# EAGLE board Projeto (EAGLE 9.7.0)

Size 222.85 x 56.04 mm. Coordinates in mm from the lower left corner, seen from the top.
Outline: 0,0 222.85,0 222.85,56.04 0,56.04 0,0
Copper layers (1*16): Top 0.035mm / dielectric 1.5mm / Bottom 0.035mm
Design rules "default": minimum track width 6mil, minimum drill 0.35mm, track to track 6mil, track to pad 6mil, pad to pad 6mil, via to via 6mil, smd to smd 6mil, copper to edge 40mil, drill to drill 6mil, minimum pad ring 10mil, minimum via ring 8mil, stop-mask expansion 4mil, vias tented up to drill 0mil, thermal gap 10mil

## Footprints (pad centres in the part's own frame; a part is rotated, then mirrored left to right if it is on the bottom)
BATTERY-GENERIC = drill 1.118 pad 3.15 octagon: + 2.54,0; - -2.54,0
CAPPRD254W65D500H1150B = drill 0.85 pad 1.45: 1 -1.27,0; 2 1.27,0
CAP-THRU-2.54MM = drill 1.016 pad 1.88: 1 -1.27,0; 2 1.27,0
LEDRD254W60D565H860B = drill 0.981 pad 1.581: 1 -1.27,0; 2 1.27,0
RESAD1016W63L850D250B = drill 0.83 pad 1.43: 1 -5.08,0; 2 5.08,0
HA-06-SM065 = drill 1 pad 1.676: 1 -2.54,-2.54; 2 0,2.54; 3 2.54,-2.54
SWITCH-MOMENTARY-PTH-6.5MM = drill 1.016 pad 1.88: 1 -3.251,2.261; 2 3.251,2.261; 3 -3.251,-2.261; 4 3.251,-2.261
SWITCH-SPDT-PTH-8.5X3.7MM = drill 1.016 pad 1.88: 1 -2.54,0; 2 0,0; 3 2.54,0
DIP826W53P254L1930H508Q14B = drill 0.786 pad 1.386: 1 -4.13,7.62; 2 -4.13,5.08; 3 -4.13,2.54; 4 -4.13,0; 5 -4.13,-2.54; 6 -4.13,-5.08; 7 -4.13,-7.62; 8 4.13,-7.62; 9 4.13,-5.08; 10 4.13,-2.54; 11 4.13,0; 12 4.13,2.54; 13 4.13,5.08; 14 4.13,7.62
DIP762W53P254L1969H508Q14B = drill 0.743 pad 1.343: 1 -3.81,7.62; 2 -3.81,5.08; 3 -3.81,2.54; 4 -3.81,0; 5 -3.81,-2.54; 6 -3.81,-5.08; 7 -3.81,-7.62; 8 3.81,-7.62; 9 3.81,-5.08; 10 3.81,-2.54; 11 3.81,0; 12 3.81,2.54; 13 3.81,5.08; 14 3.81,7.62

## Placement (x,y rotation side)
BAT2  1.5V  [BATTERY-GENERIC]  8.33,29.93 270 top
BAT3  1.5V  [BATTERY-GENERIC]  8.26,47.43 270 top
BAT4  1.5V  [BATTERY-GENERIC]  8.35,12.08 270 top
C1  10u  [CAPPRD254W65D500H1150B]  106.22,24.21 180 top
C2  330u  [CAP-THRU-2.54MM]  92.25,31.83 0 top
D2  RED  [LEDRD254W60D565H860B]  206.55,31.83 0 top
R1  150  [RESAD1016W63L850D250B]  113.84,8.97 90 top
R2  10k  [RESAD1016W63L850D250B]  118.92,11.51 90 top
R3  10  [RESAD1016W63L850D250B]  90.98,14.05 0 top
R5  470  [RESAD1016W63L850D250B]  207.82,47.07 90 top
R6  100k  [RESAD1016W63L850D250B]  101.14,44.53 90 top
R7  10k  [RESAD1016W63L850D250B]  121.46,47.07 270 top
R8  330k  [RESAD1016W63L850D250B]  118.92,44.53 90 top
RPOT1  10k  [HA-06-SM065]  83.36,24.21 0 top
S1  SWITCH_MOMENTARY  [SWITCH-MOMENTARY-PTH-6.5MM]  98.6,35.64 90 top
S2  TOGGLE  [SWITCH-SPDT-PTH-8.5X3.7MM]  200.2,24.21 0 top
S3  TOGGLE  [SWITCH-SPDT-PTH-8.5X3.7MM]  215.44,24.21 0 top
U1  NA556_DIP  [DIP826W53P254L1930H508Q14B]  121.46,28.02 90 top
U2  74HC04_PDIP  [DIP762W53P254L1969H508Q14B]  146.86,28.02 90 top
U3  74HC00_PDIP  [DIP762W53P254L1969H508Q14B]  177.34,28.02 90 top

## Library data of the parts
BAT2-BAT4 C1 C2 R1-R3 R5-R8 RPOT1 S1-S3 U2 U3 = Tinkercad
D2 = Tinkercad; CATEGORY: Opto-Electronic; SUB-CATEGORY: LED; VALUE: LED_RED
U1 = Tinkercad; CATEGORY: IC_Clock-Timing; CURRENT-SUPPLY: 20mA; DESCRIPTION: IC OSC TIMER DUAL 14-DIP; MANUFACTURER: Texas Instruments; MPN: NA556N; OPERATING_TEMP: -40°C to 105°C; PART_STATUS: Active; ROHS_COMPLIANT: ROHS3 Compliant; SUB-CATEGORY: Dual Timer

## Nets
BAT2+: BAT2.+ BAT4.-
BAT3+: BAT2.- BAT3.+
BAT3-: BAT3.- C1.2 C2.1 R2.1 R5.2 R7.1 RPOT1.1 S1.1 S1.2 S2.1 S3.1 U1.7 U2.7 U3.7
BAT4+: BAT4.+ R1.1 R6.2 R8.2 S2.3 S3.3 U1.4 U1.14 U2.14 U3.14
D2_C: D2.2 R5.1
R3_1: R3.1 RPOT1.3
U1_CV1: R2.2 U1.3
U1_CV2: R7.2 U1.11
U1_DIS1: R1.2 R3.2 U1.1
U1_DIS2: C2.2 U1.13
U1_OUT1: U1.5 U2.1
U1_THR2: R8.1 U1.12
U1_TR1: C1.1 RPOT1.2 U1.2 U1.6
U1_TR2: R6.1 S1.3 S1.4 U1.8
U2_3A: S2.2 U2.5 U3.5
U2_4A: S3.2 U2.9
U3_1A: U2.2 U3.1
U3_1B: U2.6 U3.2
U3_1Y: U3.3 U3.13
U3_2A: U1.9 U3.4
U3_2Y: U3.6 U3.12
U3_3A: U2.8 U3.9
U3_3B: U3.10 U3.11
U3_3Y: D2.1 U3.8

## Tracks (layer width: path | path; a pad name or v marks a point on that pad's centre or on a via)
BAT2+  (1 unrouted)
BAT3+  (1 unrouted)
BAT3-  (13 unrouted)
BAT4+  (9 unrouted)
D2_C  (1 unrouted)
R3_1  (1 unrouted)
U1_CV1  (1 unrouted)
U1_CV2  (1 unrouted)
U1_DIS1  (2 unrouted)
U1_DIS2  (1 unrouted)
U1_OUT1  (1 unrouted)
U1_THR2  (1 unrouted)
U1_TR1  (3 unrouted)
U1_TR2  (3 unrouted)
U2_3A  (2 unrouted)
U2_4A  (1 unrouted)
U3_1A  (1 unrouted)
U3_1B  (1 unrouted)
U3_1Y  (1 unrouted)
U3_2A  (1 unrouted)
U3_2Y  (1 unrouted)
U3_3A  (1 unrouted)
U3_3B  (1 unrouted)
U3_3Y  (1 unrouted)